# Altium PCB PCB1.PcbDoc
Units mil, origin at the board's own origin, x right, y up, seen from the top; angles counter-clockwise.
Board outline 6000 x 4000 mil, 2 copper layers (Top Layer, Bottom Layer); 9 components, 17 nets, 36 pads, 0 vias.
Unrouted connection lines stored in the file: 11.
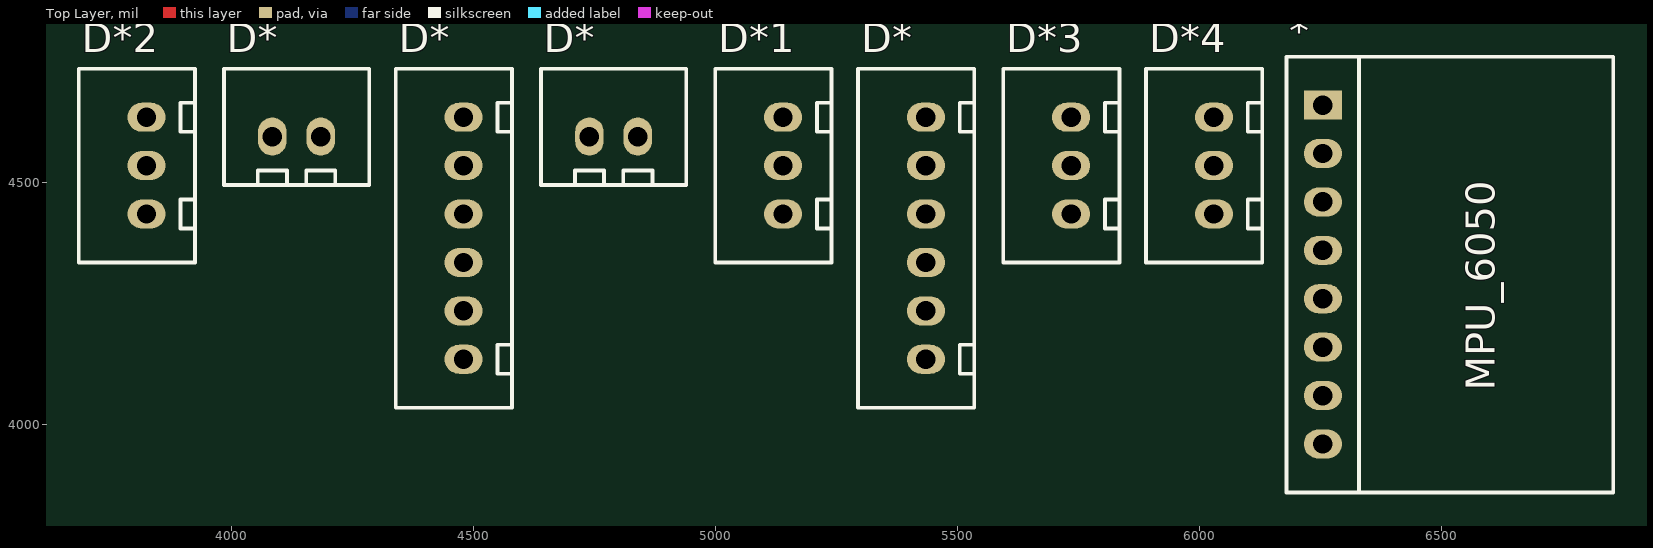
[diagram p0: Top Layer view]
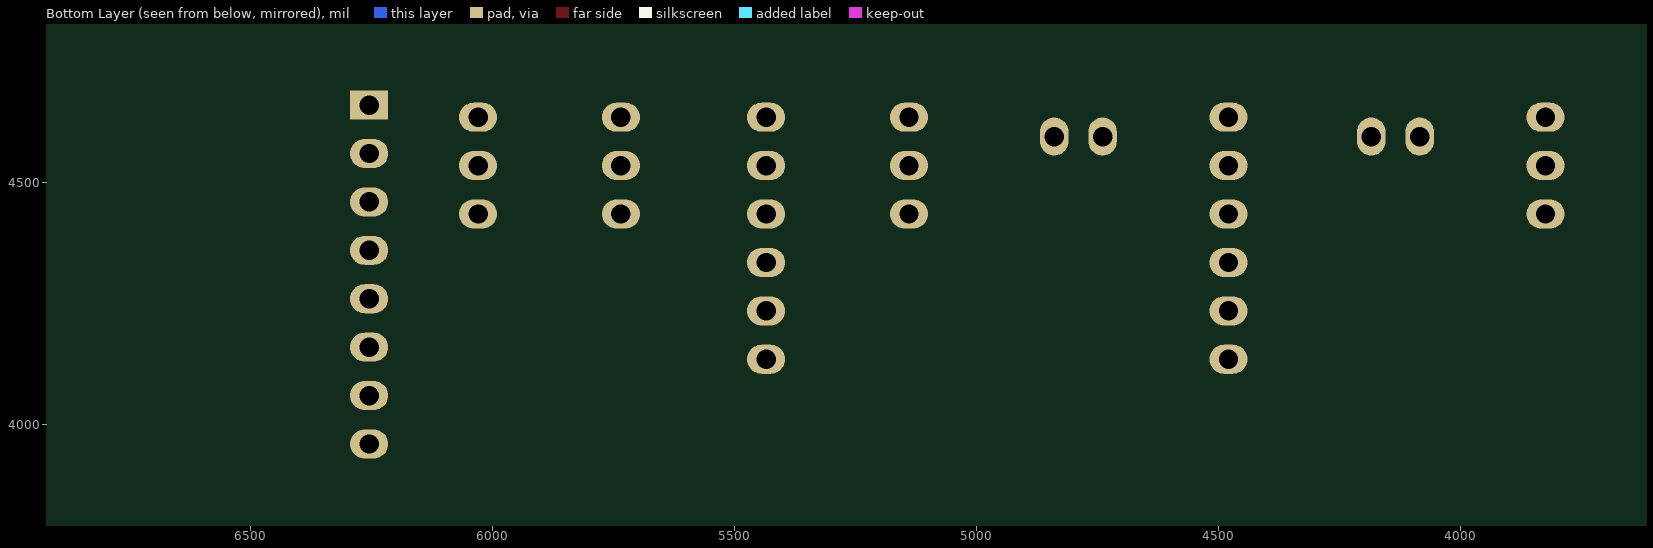
[diagram p1: Bottom Layer view, seen from below]

## Layer stack, top to bottom
Top Solder: solder mask 0.4, Solder Resist, Dk 3.5
Top Layer: signal copper 1.4
Dielectric 1: dielectric 12.6, FR-4, Dk 4.8
Bottom Layer: signal copper 1.4
Bottom Solder: solder mask 0.4, Solder Resist, Dk 3.5

## Board outline
1000,1000 7000,1000 7000,5000 1000,5000

## Design rules (kind name [scope] priority, off if disabled: settings)
Clearance [All] p1: gap=10 ignorepadtopadclearanceinfootprint=FALSE except(0: Arc-Hole Track-Hole SMDPad-Hole THPad-Hole Via-Hole Fill-Hole Poly-Hole Region-Hole Text-Hole)
PolygonConnect [All] p1: connectstyle=Relief reliefconductorwidth=10 reliefentries=4 polygonreliefangle="90 Angle" airgapwidth=10
RoutingVias [All] p1: holewidth=28 width=50 viastyle="Through Hole" minholewidth=28 minwidth=50 maxholewidth=28 maxwidth=50
SolderMaskExpansion [All] p1: expansion=4 istentingtop=FALSE
Width [All] p1: maxlimit=10 minlimit=10 preferedwidth=10
30 further rules are at their usual default settings.

## Classes and differential pairs
component class Sheet1: 12V * "Arduino Uno" D* D*1 D*2 D*3 D*4

## Components (designator, comment, footprint, x,y, rotation, side; value= is the part's Value field where it differs from the comment)
* "MPU_6050" MPU6050 6255,4310 r90 top
D* "MOTOR2" DATA_PIN_HEADER_2_2.54m 4790,4595 r0 top
D* "L298N MOTOR DRIVER: ARDUINO INPUTS" DATA_PIN_HEADER_6_2.54m 5435,4385 r90 top
D* "L298N MOTOR DRIVER: POWER SUPPLY INPUT AND OUTPUT TO MOTORS" DATA_PIN_HEADER_6_2.54m 4480,4385 r90 top
D* "MOTOR1" DATA_PIN_HEADER_2_2.54m 4135,4595 r0 top
D*1 "Right Sensor" DATA_PIN_HEADER_3_2.54m 5140,4535 r90 top
D*2 "Back Sensor" DATA_PIN_HEADER_3_2.54m 3825,4535 r90 top
D*3 "Left Sensor" DATA_PIN_HEADER_3_2.54m 5735,4535 r90 top
D*4 "Forward Sensor" DATA_PIN_HEADER_3_2.54m 6030,4535 r90 top

## Footprints (in the part's own frame and the unit in brackets; to place one, negate y for a bottom-side part, rotate by r counter-clockwise, add the part's x,y. Pads: shape width x height; smd on the part's side, far side on the other; paste and mask are expansions set on the pad)
DATA_PIN_HEADER_2_2.54m [mm]
  oval 1.5x2 hole 1.016: 1(-1.27,0) 2(1.27,0)
  silkscreen extent -3.81,-2.54 3.81,3.56, body extent -3.59,-2.54 3.81,3.21, height 7.01
DATA_PIN_HEADER_3_2.54m [mil]
  oval 60x78.74 hole 40: 1(-100,0) 2(0,0) 3(100,0)
  silkscreen extent -200,-100 200,140, body extent -195,-94 195,133, height 276
DATA_PIN_HEADER_6_2.54m [mil]
  oval 60x78.74 hole 40: 1(-250,0) 2(-150,0) 3(-50,0) 4(50,0) 5(150,0) 6(250,0)
  silkscreen extent -350,-100 350,140, body extent -343,-94 343,133, height 276
MPU6050 [mm]
  oval 1.524x2 hole 1.02: ADO(-6.35,0) GND(6.35,0) INT(-8.89,0) SCL(3.81,0) SDA(1.27,0) XCL(-3.81,0) XDA(-1.27,0)
  rect 1.524x2 hole 1.02: VCC(8.89,0)
  silkscreen extent -11.43,-15.24 11.43,1.91, body extent -10.55,-14.6 10.55,1.27, height 14.64

## Part data
D* D*: library part DATA_PIN_HEADER_2_2.54m
D* D*: library part DATA_PIN_HEADER_6_2.54m
D*1 D*2 D*3 D*4: library part DATA_PIN_HEADER_3_2.54m

## Nets (pads, with @x,y where several pads share a name; then routed paths per layer and width w, separated by ;. In a path a pad name is that pad's centre, name@x,y a point inside that pad or via, vN(x,y) a via of type N, cw(c..) or ccw(c..) an arc to the next point about the centre after c; other vN are vias at no path point)
BackSignal: D*2.3
ENA: D*.1@5435,4135
ENB: D*.6@5435,4635
ForwardSignal: D*4.3
GND: *.GND D*1.1 D*2.1 D*3.1 D*4.1 D*.2@4480,4235
IN1: D*.2@5435,4235
IN2: D*.3@5435,4335
IN3: D*.4@5435,4435
IN4: D*.5@5435,4535
LeftSignal: D*3.3
Net12V_1: D*.1@4480,4135
Net*_SCL: *.SCL
Net*_SDA: *.SDA
NetD*_1: D*.1@4740,4595 D*.6@4480,4635
NetD*_2: D*.2@4185,4595 D*.3@4480,4335
RightSignal: D*1.3
VCC: *.VCC D*1.2 D*2.2 D*3.2 D*4.2
pads on no net: *.ADO *.INT *.XCL *.XDA D*.1@4085,4595 D*.2@4840,4595 D*.4@4480,4435 D*.5@4480,4535